# Altium PCB BARBAROV Power Distrubution Board PCB.PcbDoc
Units mm, origin at the board's own origin, x right, y up, seen from the top; angles counter-clockwise.
Board outline 135 x 80 mm, 2 copper layers (Top Layer, Bottom Layer); 26 components, 7 nets, 73 pads, 198 vias.
Unrouted connection lines stored in the file: 46.
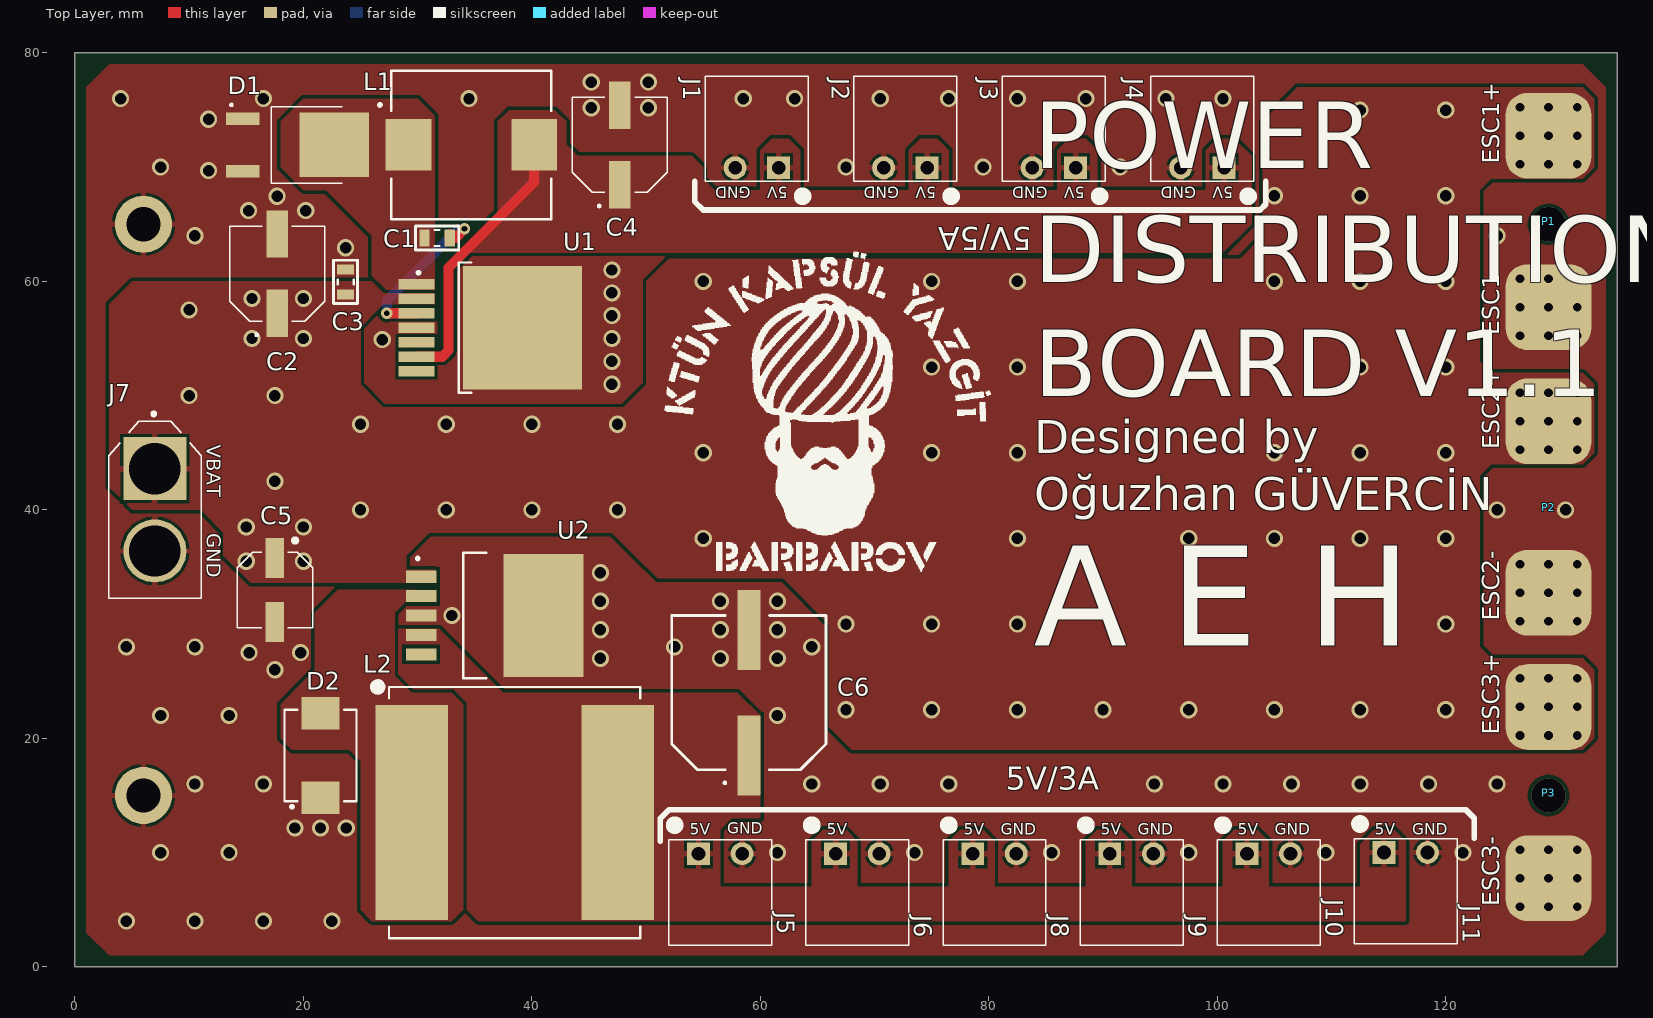
[diagram p0: Top Layer view]
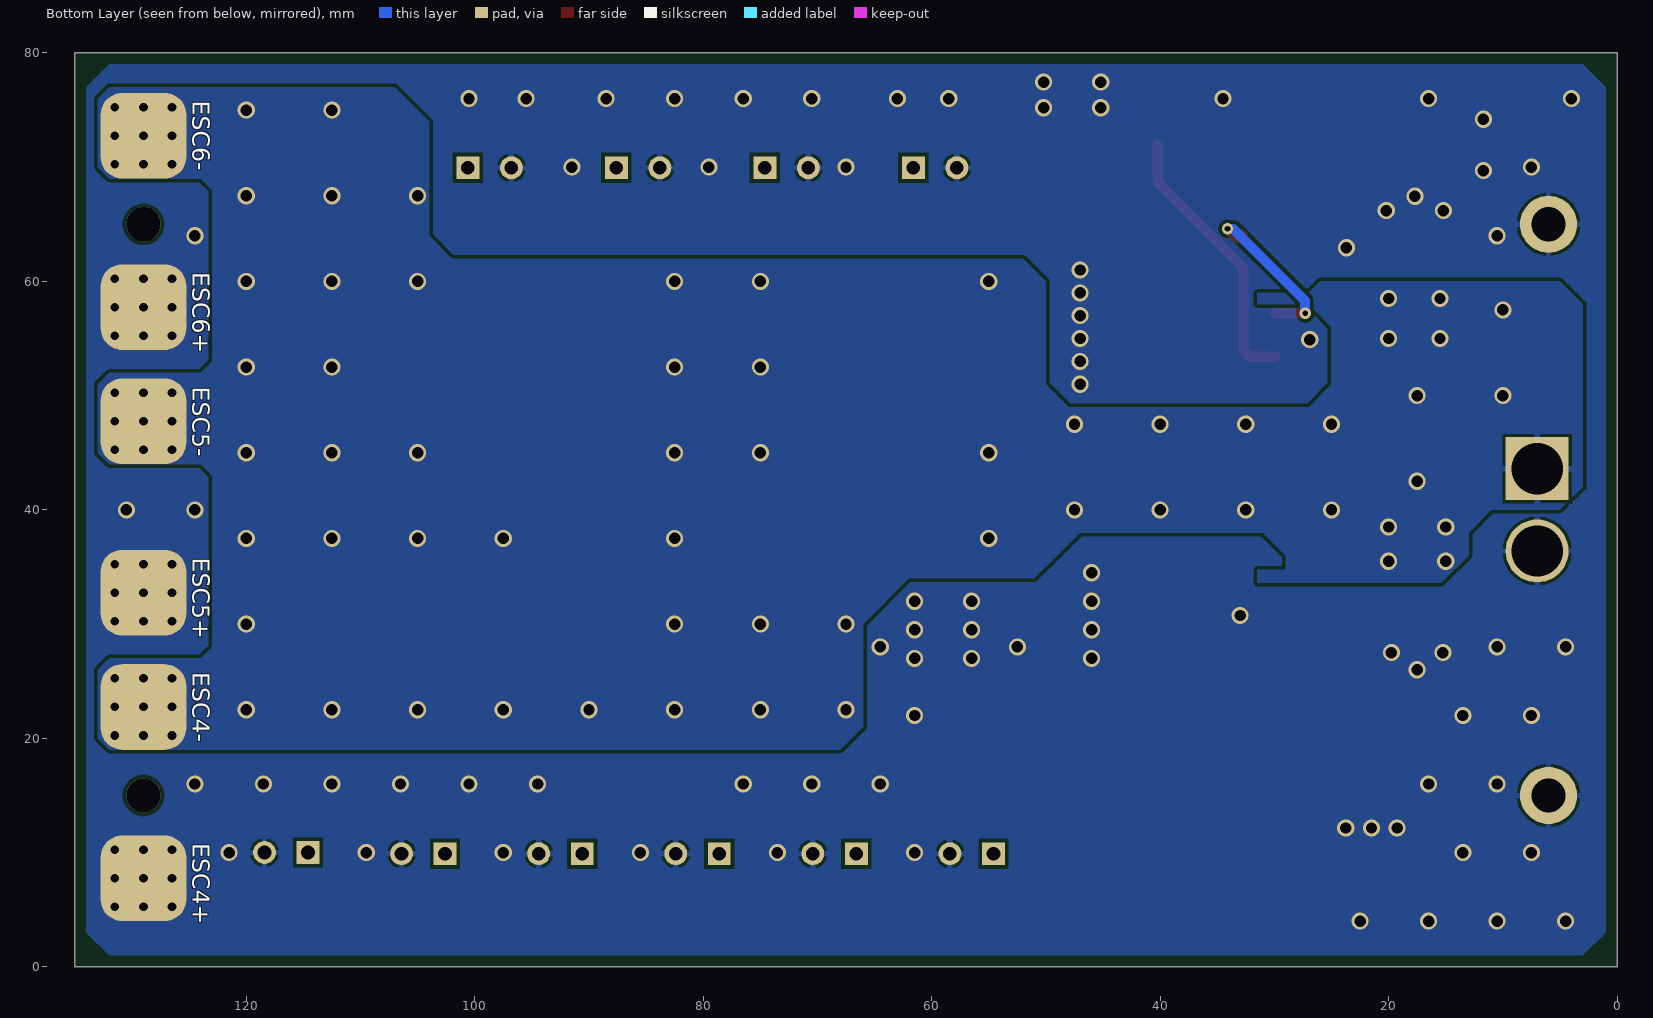
[diagram p1: Bottom Layer view, seen from below]
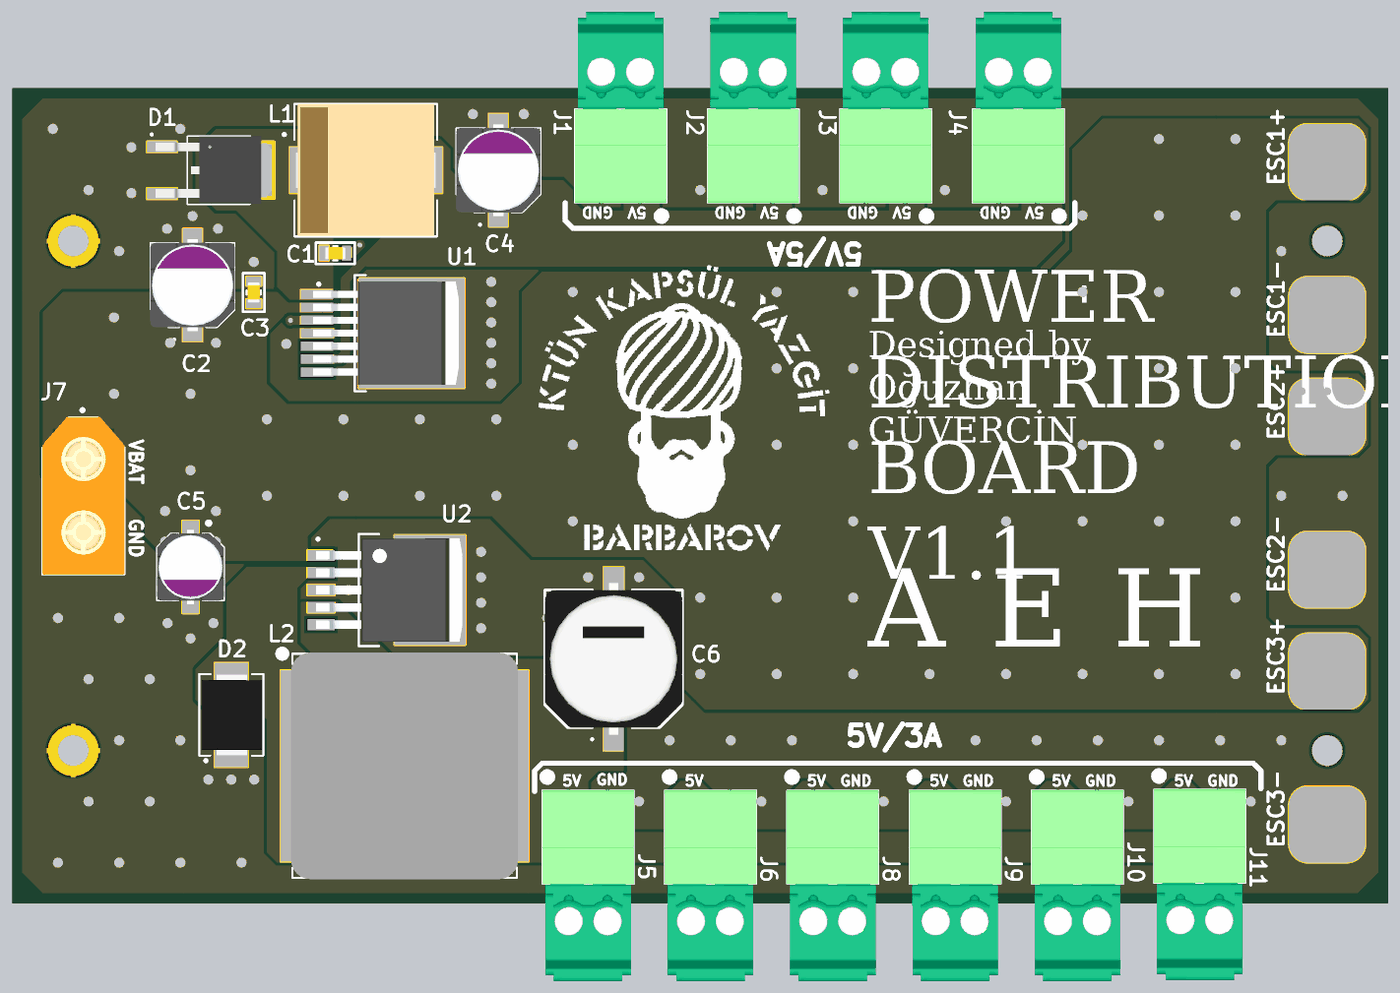
[diagram p2: 3D render of the assembled board from above, using the file's embedded part models]

## Layer stack, top to bottom
Top Solder: solder mask 0.0102, Solder Resist, Dk 3.5
Top Layer: signal copper 0.0356
Dielectric 1: dielectric 0.32, FR-4, Dk 4.8
Bottom Layer: signal copper 0.0356
Bottom Solder: solder mask 0.0102, Solder Resist, Dk 3.5

## Board outline
0,0 0,80 135,80 135,0

## Design rules (kind name [scope] priority, off if disabled: settings)
BoardOutlineClearance [All] p1: gap=0.2 ignorepadtopadclearanceinfootprint=FALSE except(0.4: Arc-SplitBarrior Arc-SplitContinuation Track-SplitBarrior Track-SplitContinuation SMDPad-SplitBarrior SMDPad-SplitContinuation THPad-SplitBarrior THPad-SplitContinuation Via-SplitBarrior Via-SplitContinuation Fill-SplitBarrior Fill-SplitContinuation Poly-SplitBarrior Poly-SplitContinuation Region-SplitBarrior Region-SplitContinuation Text-SplitBarrior Text-SplitContinuation)
Clearance Clearance_Poly [InPolygon] p1: gap=0.3 ignorepadtopadclearanceinfootprint=FALSE
Clearance "Clearance Bottom Layer" [OnLayer('Bottom Layer')] p2: gap=0.203 ignorepadtopadclearanceinfootprint=TRUE except(0.254: Arc-Text Track-Text SMDPad-Text THPad-Text Via-Text Fill-Text Poly-Text Region-Text Text-Text)
Clearance "Clearance Top Layer" [OnLayer('Top Layer')] p3: gap=0.203 ignorepadtopadclearanceinfootprint=TRUE except(0.254: Arc-Text Track-Text SMDPad-Text THPad-Text Via-Text Fill-Text Poly-Text Region-Text Text-Text)
Clearance [All] p4: gap=0.2 ignorepadtopadclearanceinfootprint=FALSE except(0.089: Arc-Arc Arc-Track Arc-SMDPad Track-Track Track-SMDPad SMDPad-SMDPad; 0.127: Arc-Via Track-Via SMDPad-Via THPad-Via Via-Via; 0.254: Arc-Text Track-Text SMDPad-Text THPad-Text Via-Text Fill-Text Poly-Text Region-Text Text-Text)
HoleSize [All] p1: absolutevalues=TRUE maxlimit=6.3 minlimit=0.2 maxpercent=80.000 minpercent=20.000
MinimumAnnularRing [All] p1: minimumring=0.076
MinimumSolderMaskSliver [All] p1: minsoldermaskwidth=0.1
PlaneConnect [All] p1: planeconnectstyle=Direct reliefexpansion=0.508 reliefentries=4 reliefconductorwidth=0.254 reliefairgap=0.254
PolygonConnect PolygonConnect_1 [All] p1: thpad.connectstyle=Relief thpad.reliefconductorwidth=0.508 thpad.reliefentries=4 thpad.polygonreliefangle="90 Angle" thpad.airgapwidth=0.254 smdpad.connectstyle=Direct smdpad.reliefconductorwidth=0.508 smdpad.reliefentries=4 smdpad.polygonreliefangle="90 Angle" smdpad.airgapwidth=0.254 via.connectstyle=Direct via.reliefconductorwidth=0.508 via.reliefentries=4 via.polygonreliefangle="90 Angle" via.airgapwidth=0.254
RoutingCorners [All] p1: cornerstyle=Round minsetback=2.54 maxsetback=2.54
RoutingVias [All] p1: holewidth=0.5 width=1 viastyle="Through Hole" minholewidth=0.2 minwidth=0.45 maxholewidth=1 maxwidth=2
SilkToSilkClearance [All] p1: silktosilkclearance=0.1
SilkToSolderMaskClearance [IsPad] p1: minsilkscreentomaskgap=0.1 clearancetoexposedcopper=TRUE
SolderMaskExpansion [All] p1: expansion=0.102 istentingtop=FALSE
Width [All] p1: maxlimit=20 minlimit=0.381 preferedwidth=1 minimp=50.000000 maximp=50.000000 favimp=50.000000
24 further rules are at their usual default settings.

## Components (designator, comment, footprint, x,y, rotation, side; value= is the part's Value field where it differs from the comment)
C1 "CAP_10nF_%10_50V_0805_X7R_CER" 0805_CAP 31.7,63.8 r180 top
C2 "CAP_180uF_20%_25V_SMD_ALUM POLY_8.30mmx8.30mm" RADIAL-2_8.30MMX8.30MM_PANASONIC 17.7,60.675 r90 top
C3 "CAP_100nF_50V_0805_C0G_CER" 0805_CAP 23.7,59.95 r90 top
C4 "CAP_330uF_20%_16V_SMD_ALUM POLY_8.30mm x 8.30mm" RADIAL-2_8.30MMX8.30MM_PANASONIC 47.7,71.95 r90 top
C5 "CAP_120uF_20%_20V_ALUM POLY_SMD" CAP_6SVPC330M 17.5,33 r270 top
C6 "CAP_470uF_20%_16V_SMD_ALUM" CAP_EEVTG1C471Q 59,24 r90 top
D1 "DIODE_SCHOTTKY_200V_10A_DPAK" 3PIN_DPAK_DIODE 19.2,71.95 r0 top
D2 "SL42-E3/57T" DIOM6959X25M 21.5,18.5 r90 top
J1 "CONN_TERM BLOCK_HDR_2POS_VERT_3.81MM" "CONN TERM BLOCK HDR 2POS 90DEG 3.81MM" 59.7,69.95 r180 top
J2 "CONN_TERM BLOCK_HDR_2POS_VERT_3.81MM" "CONN TERM BLOCK HDR 2POS 90DEG 3.81MM" 72.7,69.95 r180 top
J3 "CONN_TERM BLOCK_HDR_2POS_VERT_3.81MM" "CONN TERM BLOCK HDR 2POS 90DEG 3.81MM" 85.7,69.95 r180 top
J4 "CONN_TERM BLOCK_HDR_2POS_VERT_3.81MM" "CONN TERM BLOCK HDR 2POS 90DEG 3.81MM" 98.7,69.95 r180 top
J5 "CONN_TERM BLOCK_HDR_2POS_VERT_3.81MM" "CONN TERM BLOCK HDR 2POS 90DEG 3.81MM" 56.5,9.9 r0 top
J6 "CONN_TERM BLOCK_HDR_2POS_VERT_3.81MM" "CONN TERM BLOCK HDR 2POS 90DEG 3.81MM" 68.5,9.9 r0 top
J7 "CONN_XT60" XT60_CONN 7,40 r270 top
J8 "CONN_TERM BLOCK_HDR_2POS_VERT_3.81MM" "CONN TERM BLOCK HDR 2POS 90DEG 3.81MM" 80.5,9.9 r0 top
J9 "CONN_TERM BLOCK_HDR_2POS_VERT_3.81MM" "CONN TERM BLOCK HDR 2POS 90DEG 3.81MM" 92.5,9.9 r0 top
J10 "CONN_TERM BLOCK_HDR_2POS_VERT_3.81MM" "CONN TERM BLOCK HDR 2POS 90DEG 3.81MM" 104.5,9.9 r0 top
J11 "CONN_TERM BLOCK_HDR_2POS_VERT_3.81MM" "CONN TERM BLOCK HDR 2POS 90DEG 3.81MM" 116.5,10 r0 top
L1 "IND_10uH_10A_16.8MOHM_SMD" IND13.70MM13.70MMX7MM 34.7,71.95 r0 top
L2 "IND_100uH_9.1A_39.4MOHM_SM" SMD_IND_22.48MMX22.00MM 38.5,13.5 r0 top
P1 "ESC_PAD" ESC_SOLDER_PAD 129,65.25 r270 top
P2 "ESC_PAD" ESC_SOLDER_PAD 129,40.25 r270 top
P3 "ESC_PAD" ESC_SOLDER_PAD 129,15.25 r270 top
U1 "PMIC_LM2677" DPAK127P1435X464-8M 38.7,55.95 r0 top
U2 "PMIC_LM2576SX" TO-263-6/DDPAK 37,30.75 r0 top

## Footprints (in the part's own frame and the unit in brackets; to place one, negate y for a bottom-side part, rotate by r counter-clockwise, add the part's x,y. Pads: shape width x height; smd on the part's side, far side on the other; paste and mask are expansions set on the pad)
3PIN_DPAK_DIODE [mm]
  rect 2.94x1.1 smd: 1(-4.5,2.272) 3(-4.5,-2.3)
  rect 6.09x5.63 smd paste-4: 2(3.5,0)
  silkscreen extent -5.6,-3.35 4.19,3.6, body extent -5.14,-3.3 6.26,3.3, height 2.44
0805_CAP [mm] "Chip Resistor, 2-Leads, Body 2,00x1,25mm, IPC Medium Density"
  rect 0.9x1.5 smd: 1(-1.1,0) 2(1.1,0)
  silkscreen extent -1.9,-1.05 1.9,1.05, body extent -1,-0.6 1,0.6, height 1.21
CAP_6SVPC330M [mm]
  rect 3.5x1.6 smd: 1(-2.8,0) 2(2.8,0)
  silkscreen extent -4.55,-3.3 3.3,3.3, body extent -3.65,-3.3 3.65,3.3, height 5.9
CAP_EEVTG1C471Q [mm]
  rect 7x2 smd: 1(-5.5,0) 2(5.5,0)
  silkscreen extent -8,-6.75 6.75,6.75, body extent -7.45,-6.75 7.45,6.75, height 13.5
"CONN TERM BLOCK HDR 2POS 90DEG 3.81MM" [mm]
  rect 2x2 hole 1.2: 1(-1.905,0)
  round 2 hole 1.2: 2(1.905,0)
  silkscreen extent -4.5,-8 4.5,2.64, body extent -4.5,-17.55 4.5,1.3, height 7.6
DIOM6959X25M [mm] "Molded Diode, 2-Leads, Body 6,86x5,91mm, IPC Low Density"
  rect 2.85x3.3 smd: 1(-3.7,0) 2(3.7,0)
  silkscreen extent -4.62,-3.15 4,3.15, body extent -3.97,-3 3.97,2.91, height 2.25
DPAK127P1435X464-8M [mm] "D2-PAK, 8-Pads, Body 7,55x8,57mm (max), IPC Low Density"
  rect 3.16x0.91 smd: 1(-8.8,3.81) 2(-8.8,2.54) 3(-8.8,1.27) 4(-8.8,0) 5(-8.8,-1.27) 6(-8.8,-2.54) 7(-8.8,-3.81)
  rect 10.41x10.8 smd: 8(0.475,0)
  silkscreen extent -8.75,-5.7 -4,5.7, body extent -9.2,-5.08 5.1,5.08, height 4.72
ESC_SOLDER_PAD [mm]
  rrect50% 7.5x7.5 smd: 1(-7.5,0) 2(7.5,0)
  rrect50% 7.5x7.5 smd far side: 1(-7.5,0) 2(7.5,0)
IND13.70MM13.70MMX7MM [mm]
  rect 4x4.5 smd: 1(-5.5,0) 2(5.5,0)
  silkscreen extent -8.12,-6.5 7,6.5, body extent -6.85,-6.45 6.85,6.45, height 7.06
RADIAL-2_8.30MMX8.30MM_PANASONIC [mm]
  rect 4.15x1.9 smd: 1(-3.475,0) 2(3.475,0)
  silkscreen extent -5.45,-4.15 4.15,4.15, body extent -4.5,-4.15 4.5,4.15, height 11.91
SMD_IND_22.48MMX22.00MM [mm]
  rect 6.35x18.8 smd: 1(-9,0) 2(9,0)
  silkscreen extent -12.56,-11 11,11.56, body extent -11.13,-11.13 11.13,11.12, height 12.88
TO-263-6/DDPAK [mm]
  rect 2.66x1.07 smd mask+0.102: 1(-6.7,3.4) 2(-6.7,1.7) 3(-6.7,0) 4(-6.7,-1.7) 5(-6.7,-3.4)
  rect 7x10.8 smd mask+0.102: 6(4,0)
  silkscreen extent -7.12,-5.5 -1,5.5, body extent -7.18,-5.08 7.18,5.08, height 4.66
XT60_CONN [mm]
  rect 5.516x5.516 hole 4.5: 1(-3.6,0)
  round 5.516 hole 4.5: 2(3.6,0)
  silkscreen extent -8.55,-4.05 7.75,4.05, body extent -7.75,-4.05 7.75,4.05, height 15.88

## Part data
C1: "CAP CER 10000PF 50V X7R 0805", Capacitance=10nF, Case Code (Metric)=2012, Case Code (Imperial)=0805, Dielectric=X7R, Manufacturer=Samsung, Manufacturer Part Number=CL21B103KBANNNC, Max Operating Temperature=125°C, Min Operating Temperature=-55°C, Supplier Part Number 1=1276-1015-1-ND, Tolerance=10%, Voltage=50V, Case/Package=0805, Category="Ceramic Capacitors", ComponentLink1Description=https://datasheet.ciiva.com/25709/cl21b103kbannnc-25709781.pdf?src-supplier=Digi-Key, ComponentLink1URL=https://datasheet.ciiva.com/25709/cl21b103kbannnc-25709781.pdf?src-supplier=Digi-Key, ComponentLink2Description=https://datasheet.ciiva.com/29199/455082-da-01-en-vs-kondensator-0805-29199459.pdf?src-supplier=Conrad, ComponentLink2URL=https://datasheet.ciiva.com/29199/455082-da-01-en-vs-kondensator-0805-29199459.pdf?src-supplier=Conrad, Construction=Flat, Contact Plating=Tin, Depth=1.25mm, Height=0.65mm, Lead Free="Lead Free", Length=2mm, Material=Ceramic, Mount="Surface Mount", Packaging="Tape and Reel", Pricing 1="1=0,10000, 10=0,04600, 50=0,02500, 100=0,02050, 500=0,01464, 1000=0,01150 (USD)", Radiation Hardening=No, RoHS=Yes, RoHS Compliant=Yes, Series=CL, Stock 1=1431273, Supplier 1=Digi-Key, Thickness=0.03inch, Voltage Rating=50V, Voltage Rating (DC)=50V, Width=0.049inch
C2: "Cap Aluminum Polymer 180uF 25V 20% Cylindrical 16m Ohm 1470mA 2000 hr 125°C Emboss T/R", Capacitance=180uF, Manufacturer=Panasonic, Manufacturer Part Number=25SVT180M, Supplier Part Number 1=10-25SVT180MCT-ND, Category="Polymer Capacitors", Pricing 1="1=3,01000, 10=2,43800, 50=2,12720, 100=1,86140 (USD)", RoHS=Yes, Stock 1=129, Supplier 1=Digi-Key
C3: "Cap Ceramic 0.1uF 50V X7R 20% SMD 0805 125C Paper T/R", Capacitance=100nF, Case/Package=0805, Dielectric=X7R, Dielectric Material=Ceramic, Manufacturer=KEMET, Manufacturer Part Number=C0805C104M5RACTU, Max Operating Temperature=125°C, Min Operating Temperature=-55°C, Supplier Part Number 1=399-C0805C104M5RAC7800CT-ND, Tolerance=20%, Voltage Rating (DC)=50V, Category="Ceramic Capacitors", ComponentLink1Description=http://uk.rs-online.com/webdocs/13da/0900766b813daa06.pdf?src-supplier=RSComponents, ComponentLink1URL=http://uk.rs-online.com/webdocs/13da/0900766b813daa06.pdf?src-supplier=RSComponents, ComponentLink2Description=http://uk.rs-online.com/webdocs/1515/0900766b81515223.pdf?src-supplier=RSComponents, ComponentLink2URL=http://uk.rs-online.com/webdocs/1515/0900766b81515223.pdf?src-supplier=RSComponents, ComponentLink3Description=http://www.farnell.com/datasheets/2739857.pdf?src-supplier=Farnell, ComponentLink3URL=http://www.farnell.com/datasheets/2739857.pdf?src-supplier=Farnell, ComponentLink4Description=http://components.arrow.com/part/dataview/0323_00324812?src-supplier=Arrow+Europe, ComponentLink4URL=http://components.arrow.com/part/dataview/0323_00324812?src-supplier=Arrow+Europe, ComponentLink5Description=http://uk.rs-online.com/webdocs/1528/0900766b81528e2f.pdf?src-supplier=RSComponents, ComponentLink5URL=http://uk.rs-online.com/webdocs/1528/0900766b81528e2f.pdf?src-supplier=RSComponents, ComponentLink6Description=http://www.farnell.com/datasheets/2739857.pdf?src-supplier=Newark, ComponentLink6URL=http://www.farnell.com/datasheets/2739857.pdf?src-supplier=Newark, ComponentLink7Description=https://api.kemet.com/component-edge/download/datasheet/C0805C104M5RACTU.pdf?src-supplier=Digi-Key, ComponentLink7URL=https://api.kemet.com/component-edge/download/datasheet/C0805C104M5RACTU.pdf?src-supplier=Digi-Key, ComponentLink8Description=http://www.farnell.com/datasheets/2739857.pdf?src-supplier=Element14, ComponentLink8URL=http://www.farnell.com/datasheets/2739857.pdf?src-supplier=Element14, ComponentLink9Description=http://www.alliedelec.com/m/d/9bfe7773041ffe9d406e68bc7b377fdd.pdf?src-supplier=Allied+Electronics, ComponentLink9URL=http://www.alliedelec.com/m/d/9bfe7773041ffe9d406e68bc7b377fdd.pdf?src-supplier=Allied+Electronics, ComponentLink10Description=http://www.mouser.com/ds/2/212/KEM_C1002_X7R_SMD-1102033.pdf?src-supplier=Mouser, ComponentLink10URL=http://www.mouser.com/ds/2/212/KEM_C1002_X7R_SMD-1102033.pdf?src-supplier=Mouser, ComponentLink11Description=http://capacitoredge.kemet.com/capedge2/DataSheet?pn=C0805C104M5RACTU&src-supplier=Avnet+Europe, ComponentLink11URL=http://capacitoredge.kemet.com/capedge2/DataSheet?pn=C0805C104M5RACTU&src-supplier=Avnet+Europe, Depth=1.25mm, Height=0.9mm, Length=2mm, Mount="Surface Mount", Packaging="Tape and Reel", Pricing 1="1=0,10000, 10=0,06400, 50=0,03500, 100=0,02860, 500=0,02040, 1000=0,01603 (USD)", Radiation Hardening=No, RoHS=Yes, Stock 1=4863, Supplier 1=Digi-Key
C4: "Cap Alum Poly 330UF 20% 16V SMD", Capacitance=330uF, Case/Package=Radial, ESR (Equivalent Series Resistance)=10mR, Manufacturer="Wurth Electronics", Manufacturer Part Number=875075355004, Max Operating Temperature=105°C, Min Operating Temperature=-55°C, Package Quantity=400, Ripple Current=4.7A, Supplier Part Number 1=732-6491-1-ND, Tolerance=20%, Voltage Rating=16V, Category="Polymer Capacitors", ComponentLink1Description=http://www.farnell.com/datasheets/1880458.pdf?src-supplier=Farnell, ComponentLink1URL=http://www.farnell.com/datasheets/1880458.pdf?src-supplier=Farnell, ComponentLink2Description=http://katalog.we-online.de/pbs/datasheet/875075355004.pdf?src-supplier=Digi-Key, ComponentLink2URL=http://katalog.we-online.de/pbs/datasheet/875075355004.pdf?src-supplier=Digi-Key, ComponentLink3Description=http://www.farnell.com/datasheets/1880458.pdf?src-supplier=Element14, ComponentLink3URL=http://www.farnell.com/datasheets/1880458.pdf?src-supplier=Element14, Height - Seated (Max)=0.461inch, Life (Hours)=2000Hour, Mount="Surface Mount", Packaging="Tape and Reel", Polarity=Polar, Pricing 1="1=1,18000, 50=1,00600, 100=0,87700 (USD)", REACH SVHC=Unknown, RoHS=Yes, RoHS Compliant=Yes, Stock 1=2224, Supplier 1=Digi-Key, Voltage Rating (DC)=16V
C5: "Cap Aluminum Polymer 120uF 20VDC 20%( 6.3 X 5.9mm) SMD 0.025 Ohm 3200mA 5000h 105C T/R", Capacitance=120uF, Case/Package=Radial, ESR (Equivalent Series Resistance)=25mR, Leakage Current=480uA, Manufacturer=Panasonic, Manufacturer Part Number=20SVPF120M, Max Operating Temperature=105°C, Min Operating Temperature=-55°C, Package Quantity=1000, Ripple Current=3.2A, Supplier Part Number 1=P16498CT-ND, Tolerance=20%, Voltage=20V, Category="Aluminum Electrolytic Capacitors", ComponentLink1Description=https://datasheet.ciiva.com/24432/svpf-series-datasheet-24432811.pdf?src-supplier=Onlinecomponents.com, ComponentLink1URL=https://datasheet.ciiva.com/24432/svpf-series-datasheet-24432811.pdf?src-supplier=Onlinecomponents.com, ComponentLink2Description=https://datasheet.ciiva.com/25746/1734360-25746680.pdf?src-supplier=Farnell, ComponentLink2URL=https://datasheet.ciiva.com/25746/1734360-25746680.pdf?src-supplier=Farnell, ComponentLink3Description=https://datasheet.ciiva.com/22746/1734360-22746206.pdf?src-supplier=Element14, ComponentLink3URL=https://datasheet.ciiva.com/22746/1734360-22746206.pdf?src-supplier=Element14, ComponentLink4Description=https://datasheet.ciiva.com/46650/70324301-46650876.pdf?src-supplier=Allied+Electronics, ComponentLink4URL=https://datasheet.ciiva.com/46650/70324301-46650876.pdf?src-supplier=Allied+Electronics, Diameter=6.3mm, Dissipation Factor=12%, Height=5.9mm, Height - Seated (Max)=0.236inch, Lead Free="Lead Free", Length=5.9mm, Life (Hours)=5000Hour, Material=Polymer, Mount="Surface Mount", Number of Pins=6, Packaging="Tape and Reel", Polarity=Polar, Pricing 1="1=1,41000, 10=1,11000, 50=0,96240, 100=0,83280, 500=0,62922 (USD)", Radiation Hardening=No, REACH SVHC="No SVHC", Ripple Current (AC)=3.2A, RoHS=Yes, RoHS Compliant=Yes, Stock 1=5, Supplier 1=Digi-Key, Termination=SMD/SMT, Voltage Rating=20V, Voltage Rating (DC)=20V
C6: "贴片铝电解电容 470uF ±20% 16V 0.12Ω 2000hrs@125°C AEC_D12.5x13.5mm_SM", Capacitance=470uF, Case/Package=Radial, ESR (Equivalent Series Resistance)=120mR, Manufacturer=Panasonic, Manufacturer Part Number=EEV-TG1C471Q, Max Operating Temperature=125°C, Min Operating Temperature=-40°C, Package Quantity=200, Ripple Current=800mA, Supplier Part Number 1=PCE3629CT-ND, Tolerance=20%, Voltage Rating=16V, Category="Aluminum Electrolytic Capacitors", ComponentLink1Description=https://datasheet.ciiva.com/8081/aba0000ce101-8081367.pdf?src-supplier=Element14, ComponentLink1URL=https://datasheet.ciiva.com/8081/aba0000ce101-8081367.pdf?src-supplier=Element14, ComponentLink2Description=https://datasheet.ciiva.com/43470/1678958-43470874.pdf?src-supplier=Farnell, ComponentLink2URL=https://datasheet.ciiva.com/43470/1678958-43470874.pdf?src-supplier=Farnell, ComponentLink3Description=https://datasheet.ciiva.com/46379/1678958-46379244.pdf?src-supplier=Element14, ComponentLink3URL=https://datasheet.ciiva.com/46379/1678958-46379244.pdf?src-supplier=Element14, ComponentLink4Description=https://datasheet.ciiva.com/31417/1678958-31417838.pdf?src-supplier=Farnell, ComponentLink4URL=https://datasheet.ciiva.com/31417/1678958-31417838.pdf?src-supplier=Farnell, ComponentLink5Description=https://datasheet.ciiva.com/46372/1678958-46372616.pdf?src-supplier=Element14, ComponentLink5URL=https://datasheet.ciiva.com/46372/1678958-46372616.pdf?src-supplier=Element14, ComponentLink6Description=https://datasheet.ciiva.com/24025/aba0000ce101-30808-24025129.pdf?src-supplier=Mouser, ComponentLink6URL=https://datasheet.ciiva.com/24025/aba0000ce101-30808-24025129.pdf?src-supplier=Mouser, ComponentLink7Description=https://datasheet.ciiva.com/14598/70068299-14598696.pdf?src-supplier=Allied+Electronics, ComponentLink7URL=https://datasheet.ciiva.com/14598/70068299-14598696.pdf?src-supplier=Allied+Electronics, ComponentLink8Description=https://datasheet.ciiva.com/11679/aba0000ce101-11679349.pdf?src-supplier=Avnet, ComponentLink8URL=https://datasheet.ciiva.com/11679/aba0000ce101-11679349.pdf?src-supplier=Avnet, ComponentLink9Description=https://datasheet.ciiva.com/30085/aba0000ce101-30085800.pdf?src-supplier=Onlinecomponents.com, ComponentLink9URL=https://datasheet.ciiva.com/30085/aba0000ce101-30085800.pdf?src-supplier=Onlinecomponents.com, Construction=Cylindrical, Diameter=12.5mm, Dissipation Factor=0.23%, Height=13.5mm, Height - Seated (Max)=0.531inch, Lead Free="Lead Free", Length=13.5mm, Life (Hours)=2000Hour, Mount="Surface Mount,PCB", Packaging="Tape and Reel", Polarity=Polar, Pricing 1="1=1,92000, 10=1,51400, 50=1,31240, 100=1,13570 (USD)", Radiation Hardening=No, REACH SVHC="No SVHC", Ripple Current (AC)=800mA, RoHS=Yes, RoHS Compliant=Yes, Series=TG, Stock 1=6175, Supplier 1=Digi-Key, Termination=SMD/SMT, Voltage Rating (DC)=16V, Width=900um
D1: "Diode Schottky 200V 10A Dpak", Manufacturer="Sangdest Microelectronics", Manufacturer Part Number=SBRD10200, Supplier Part Number 1=1655-SBRD10200CT-ND, Category=Uncategorized, Pricing 1="1=0,59000, 10=0,50300, 100=0,37580, 500=0,29524, 1000=0,22814 (USD)", RoHS=No, Stock 1=138862, Supplier 1=Digi-Key
D2: library part "DIODE SCHOTTKY 20V 4A DO214AB", "SL42 Series 20 V 2 A Surface Mount Schottky Barrier Rectifier - DO-214AB (SMC)", Average Rectified Current=4A, Case/Package=SMC, Forward Voltage=470mV, Manufacturer="Vishay Semiconductors", Max Forward Surge Current (Ifsm)=150A, Max Operating Temperature=125°C, Max Repetitive Reverse Voltage (Vrrm)=20V, Max Reverse Current=500uA, Min Operating Temperature=-55°C, Package Quantity=1, Supplier Part Number 1=SL42-E3/57TGICT-ND, Category="Rectifier Diodes", ComponentLink1Description=https://datasheet.ciiva.com/4714/88742-103296-4714672.pdf?src-supplier=Mouser, ComponentLink1URL=https://datasheet.ciiva.com/4714/88742-103296-4714672.pdf?src-supplier=Mouser, ComponentLink2Description=https://datasheet.ciiva.com/16355/sl42-16355184.pdf?src-supplier=Future+Electronics, ComponentLink2URL=https://datasheet.ciiva.com/16355/sl42-16355184.pdf?src-supplier=Future+Electronics, ComponentLink3Description=https://datasheet.ciiva.com/23793/1691224-23793280.pdf?src-supplier=Newark, ComponentLink3URL=https://datasheet.ciiva.com/23793/1691224-23793280.pdf?src-supplier=Newark, ComponentLink4Description=https://datasheet.ciiva.com/4246/sl42-4246044.pdf?src-supplier=Arrow+Electronics, ComponentLink4URL=https://datasheet.ciiva.com/4246/sl42-4246044.pdf?src-supplier=Arrow+Electronics, Current Rating=4A, Element Configuration=Single, Forward Current=4A, Lead Free="Lead Free", Manufacturer Part Number=SL42-E3/57T, Max Reverse Leakage Current=500uA, Max Reverse Voltage (DC)=20V, Max Surge Current=150A, Mount="Surface Mount", Number of Pins=2, Output Current=4A, Packaging="Tape and Reel", Peak Non-Repetitive Surge Current=150A, Polarity=Standard, Pricing 1="1=0,97000, 10=0,87000, 100=0,67830 (USD)", Radiation Hardening=No, REACH SVHC=Unknown, RoHS=Yes, RoHS Compliant=Yes, Series=-, Stock 1=210, Supplier 1=Digi-Key, Voltage Rating (DC)=20V
J1 J2 J3 J4 J5 J6 J8 J9 J10 J11: "2 Position Terminal Block Header, Male Pins, Shrouded (4 Side) 0.150\" (3.81mm) 90°, Right Angle - Through Hole", Color=Green, Current=8A, Flammability Rating="UL94 V-0", Manufacturer="Phoenix Contact", Manufacturer Part Number=1803277, Package Quantity=50, Supplier Part Number 1=277-1206-ND, Voltage=300V, Voltage Rating=160V, Voltage Rating (DC)=640mV, Approvals=UL,CSA, Category="Terminal Blocks", ComponentLink1Description=https://datasheet.ciiva.com/16096/1803277-16096845.pdf?src-supplier=Onlinecomponents.com, ComponentLink1URL=https://datasheet.ciiva.com/16096/1803277-16096845.pdf?src-supplier=Onlinecomponents.com, ComponentLink2Description=https://datasheet.ciiva.com/26840/getdatasheetpartid-233794-26840495.pdf?src-supplier=Verical, ComponentLink2URL=https://datasheet.ciiva.com/26840/getdatasheetpartid-233794-26840495.pdf?src-supplier=Verical, ComponentLink3Description=https://datasheet.ciiva.com/11746/0900766b80029ea6-11746612.pdf?src-supplier=RSComponents, ComponentLink3URL=https://datasheet.ciiva.com/11746/0900766b80029ea6-11746612.pdf?src-supplier=RSComponents, ComponentLink4Description=https://datasheet.ciiva.com/795/1803277-795413.pdf?src-supplier=Digi-Key, ComponentLink4URL=https://datasheet.ciiva.com/795/1803277-795413.pdf?src-supplier=Digi-Key, ComponentLink5Description=https://datasheet.ciiva.com/23596/1581611-23596276.pdf?src-supplier=Newark, ComponentLink5URL=https://datasheet.ciiva.com/23596/1581611-23596276.pdf?src-supplier=Newark, ComponentLink6Description=https://datasheet.ciiva.com/29212/740533-da-01-de-leiterplattenstecker-mc-1-5-2-g-3-81-29212066.pdf?src-supplier=Conrad, ComponentLink6URL=https://datasheet.ciiva.com/29212/740533-da-01-de-leiterplattenstecker-mc-1-5-2-g-3-81-29212066.pdf?src-supplier=Conrad, Connector Type="Plug,PCB,Terminal Block", Contact Gender=Male, Contact Material=Tin, Contact Plating=Tin, Current Rating=8A, Depth=9.2mm, Gender=Male, Height=9.2mm, Housing Color=Green, Housing Material=Polybutylene, Lead Free="Lead Free", Length=9.01mm, Max Current Rating=8A, Mount="Through Hole", Number of Contacts=2, Number of Levels=1, Number of Poles=2, Number of Positions=2, Number of Positions Per Level=2, Number of Rows=1, Orientation="Right Angle", Packaging=Bulk, Pitch=3.81mm, Pricing 1="1=0,91000, 10=0,87400, 50=0,83600, 100=0,81320, 250=0,76000, 500=0,69920, 1000=0,64600, 2500=0,61560, 5000=0,58520 (USD)", REACH SVHC=Unknown, RoHS=Yes, RoHS Compliant=Yes, Series=MC, Stock 1=18415, Supplier 1=Digi-Key, Termination=Solder, Voltage Rating (AC)=160V, Weight=4oz, Width=10.65mm
J7: "XT60 Connectors Male/female Pair", Manufacturer=SparkFun, Manufacturer Part Number=PRT-10474, Supplier Part Number 1=1568-1816-ND, ComponentLink1Description=https://cdn.sparkfun.com/datasheets/Prototyping/xt60.pdf?src-supplier=Digi-Key, ComponentLink1URL=https://cdn.sparkfun.com/datasheets/Prototyping/xt60.pdf?src-supplier=Digi-Key, Pricing 1="1=1,50000 (USD)", RoHS=No, Stock 1=2196, Supplier 1=Digi-Key
L1: "Inductor Power Shielded Wirewound 10uH 20% 100KHz Iron 10A 0.0168Ohm DCR T/R", Case/Package=Nonstandard, Current=15A, Current Rating=10A, DC Resistance (DCR)=16.8mR, Manufacturer=Bourns, Manufacturer Part Number=SRP1270-100M, Max Operating Temperature=125°C, Min Operating Temperature=-55°C, Package Quantity=400, Resistor Type=Wirewound, Saturation Current=16A, Self Resonant Frequency=10MHz, Supplier Part Number 1=SRP1270-100MCT-ND, Test Frequency=100kHz, Tolerance=20%, Inductance=10uH, Category="Fixed Inductors", ComponentLink1Description=https://datasheet.ciiva.com/22704/1834359-22704150.pdf?src-supplier=Element14, ComponentLink1URL=https://datasheet.ciiva.com/22704/1834359-22704150.pdf?src-supplier=Element14, ComponentLink2Description=https://datasheet.ciiva.com/11802/0900766b80f2b679-11802877.pdf?src-supplier=RSComponents, ComponentLink2URL=https://datasheet.ciiva.com/11802/0900766b80f2b679-11802877.pdf?src-supplier=RSComponents, ComponentLink3Description=https://datasheet.ciiva.com/3082/srp1270-3082275.pdf?src-supplier=Avnet, ComponentLink3URL=https://datasheet.ciiva.com/3082/srp1270-3082275.pdf?src-supplier=Avnet, ComponentLink4Description=https://datasheet.ciiva.com/6698/srp1270-6698645.pdf?src-supplier=Digi-Key, ComponentLink4URL=https://datasheet.ciiva.com/6698/srp1270-6698645.pdf?src-supplier=Digi-Key, ComponentLink5Description=https://datasheet.ciiva.com/6698/srp1270-6698646.pdf?src-supplier=Digi-Key, ComponentLink5URL=https://datasheet.ciiva.com/6698/srp1270-6698646.pdf?src-supplier=Digi-Key, ComponentLink6Description=https://datasheet.ciiva.com/15160/getdatasheetpartid-137626-15160492.pdf?src-supplier=Verical, ComponentLink6URL=https://datasheet.ciiva.com/15160/getdatasheetpartid-137626-15160492.pdf?src-supplier=Verical, ComponentLink7Description=https://datasheet.ciiva.com/17286/srp1270-17286206.pdf?src-supplier=Avnet+Europe, ComponentLink7URL=https://datasheet.ciiva.com/17286/srp1270-17286206.pdf?src-supplier=Avnet+Europe, Core Material=Ferrite, DC Current=10A, Depth=13.7mm, Height=7mm, Height - Seated (Max)=0.276inch, Length=13.7mm, Max DC Current=10A, Military Standard=Not, Mount="Surface Mount", Packaging="Tape and Reel", Pricing 1="1=1,83000, 10=1,69100, 25=1,54960, 50=1,32420, 100=1,18340 (USD)", Radiation Hardening=No, REACH SVHC="No SVHC", RMS Current (Irms)=10A, RoHS=Yes, RoHS Compliant=Yes, Series=SRP1270, Shielding=Shielded, Stock 1=10712, Supplier 1=Digi-Key, Termination=SMD/SMT, Width=0.539inch, Inductance Tolerance=20%
L2: "Inductor Power Shielded Wirewound 100uH 20% 100KHz Powdered Iron 9.1A 0.0394Ohm DCR 8787 T/R", Case/Package=8787, DC Resistance (DCR)=39.4mR, Manufacturer="Vishay Dale", Manufacturer Part Number=IHLP8787MZER101M51, Max DC Current=9.1A, Max Operating Temperature=155°C, Min Operating Temperature=-55°C, Package Quantity=100, Supplier Part Number 1=541-IHLP8787MZER101M51CT-ND, Tolerance=20%, Inductance=100uH, Category=Inductors, ComponentLink1Description=http://www.mouser.com/ds/2/427/ihlp8787mz51-537150.pdf?src-supplier=Mouser, ComponentLink1URL=http://www.mouser.com/ds/2/427/ihlp8787mz51-537150.pdf?src-supplier=Mouser, Height=13mm, Length=22mm, Packaging="Tape and Reel", Pricing 1="1=10,02000, 10=8,91000, 25=8,24160, 50=7,12800 (USD)", RoHS=Yes, RoHS Compliant=Yes, Shielding=Shielded, Stock 1=27, Supplier 1=Digi-Key, Termination=SMD/SMT, Width=22.48mm
U1: "SIMPLE SWITCHE High Efficiency 5A Step-Down Voltage egulator with Sync 7-DDPAK/TO-263 -40 to 125", Case/Package=TO-263, Manufacturer="TI National Semiconductor", Manufacturer Part Number=LM2677SX-5.0/NOPB, Max Operating Temperature=125°C, Max Output Current=5A, Max Input Voltage=40V, Min Operating Temperature=-40°C, Min Output Voltage=5V, Min Input Voltage=8V, Package Quantity=500, Quiescent Current=4.2mA, Supplier Part Number 1=296-48568-1-ND, Switching Frequency=260kHz, Category="Voltage Regulators - Switching", ComponentLink1Description=https://datasheet.ciiva.com/15112/getdatasheetpartid-55533-15112619.pdf?src-supplier=Verical, ComponentLink1URL=https://datasheet.ciiva.com/15112/getdatasheetpartid-55533-15112619.pdf?src-supplier=Verical, ComponentLink2Description=https://datasheet.ciiva.com/26100/lm2677-26100074.pdf?src-supplier=Avnet+Europe, ComponentLink2URL=https://datasheet.ciiva.com/26100/lm2677-26100074.pdf?src-supplier=Avnet+Europe, ComponentLink3Description=https://datasheet.ciiva.com/14304/lm2677-14304284.pdf?src-supplier=Avnet, ComponentLink3URL=https://datasheet.ciiva.com/14304/lm2677-14304284.pdf?src-supplier=Avnet, Contact Plating=Tin,Matte, Efficiency=84%, Lead Free="Contains Lead", Mount="Surface Mount", Number of Outputs=1, Operating Supply Voltage=40V, Output Configuration=Positive, Output Current=5A, Output Type=Fixed, Output Voltage=5V, Packaging="Tape and Reel", Pricing 1="1=6,95000, 10=6,24400, 25=5,90280, 100=5,11580, 250=4,85348 (USD)", Radiation Hardening=No, RoHS=Yes, RoHS Compliant=Yes, Stock 1=763, Supplier 1=Digi-Key, Synchronous Rectifier=No
U2: "IC REG BUCK 5V 3A TO263-5", Case/Package=TO-263-6, Manufacturer="TI National Semiconductor", Manufacturer Part Number=LM2576SX-5.0/NOPB, Max Operating Temperature=125°C, Max Output Current=3A, Max Input Voltage=40V, Min Operating Temperature=-40°C, Min Input Voltage=4V, Nominal Output Voltage=5V, Package Quantity=500, Quiescent Current=5mA, Supplier Part Number 1=LM2576SX-5.0/NOPBCT-ND, Switching Frequency=52kHz, Category="Voltage Regulators - Switching", ComponentLink1Description=https://datasheet.ciiva.com/41457/001013741-da-01-en-ic-reg-bu-lm2576sx-5-0-nopb-to-263-5-tid-41457614.pdf?src-supplier=Conrad, ComponentLink1URL=https://datasheet.ciiva.com/41457/001013741-da-01-en-ic-reg-bu-lm2576sx-5-0-nopb-to-263-5-tid-41457614.pdf?src-supplier=Conrad, Contact Plating=Tin, Efficiency=77%, Lead Free="Contains Lead", Mount="Surface Mount", Number of Outputs=1, Number of Pins=5, Operating Supply Voltage=40V, Output Current=3A, Output Type=Fixed, Output Voltage=5V, Packaging="Tape and Reel", Pricing 1="1=4,06000, 10=3,64300, 25=3,44400, 100=2,98470, 250=2,83168 (USD)", Radiation Hardening=No, REACH SVHC="No SVHC", RoHS=Yes, RoHS Compliant=Yes, Series="SIMPLE SWITCHER®", Stock 1=2560, Supplier 1=Digi-Key, Synchronous Rectifier=No

## Free pads (board coordinates)
  round 5 hole 3: 1(6,65) 2(6,15)
  round 3 hole 3: 3(129,65) 4(129,15)

## Via types
v1: diameter 1.5, hole 1, Top Layer to Bottom Layer, tented both sides, 142 vias
v2: diameter 1, hole 0.75, Top Layer to Bottom Layer, 54 vias
v3: diameter 1, hole 0.5, Top Layer to Bottom Layer, tented both sides, 2 vias

## Nets (pads, with @x,y where several pads share a name; then routed paths per layer and width w, separated by ;. In a path a pad name is that pad's centre, name@x,y a point inside that pad or via, vN(x,y) a via of type N, cw(c..) or ccw(c..) an arc to the next point about the centre after c; other vN are vias at no path point)
5V/3A: C6.1 J5.1 J6.1 J8.1 J9.1 J10.1 J11.1 L2.2 U2.4
5V/5A: C4.1 J1.1 J2.1 J3.1 J4.1 L1.2 U1.6 | length 24.1
  Top Layer w0.9: U1.6 32.16,53.41 32.7,53.95 32.7,61.2 40.2,68.7 L1.2
CB: C1.1 U1.3 | length 14.6
  Top Layer w0.9: v3(27.3,57.2) 27.315,57.215 29.895,57.215 U1.3 ; C1.1 C1.1@32.8,64.1 ; 33.308,63.792 34.1,64.584 v3(34.1,64.6)
  Bottom Layer w0.9: v3(27.3,57.2) 27.319,57.219 27.319,58.319 33.581,64.581 34.081,64.581 v3(34.1,64.6)
GND: C2.2 C3.2 C4.2 C5.2 C6.2 D1.1 D1.3 D2.1 J1.2 J2.2 J3.2 J4.2 J5.2 J6.2 J7.2 J8.2 J9.2 J10.2 J11.2 P1.2 P2.2 P3.2 pad.1 pad.2 U1.4 U1.8 U2.3 U2.6
  other v1: 4.5,4 10.5,4 16.5,4 22.5,4 7.5,10 13.5,10 61.5,10 73.5,10 85.5,10 97.5,10 109.5,10 121.5,10 19.25,12.15 21.5,12.15 23.75,12.15 10.5,16 16.5,16 64.5,16 70.5,16 76.5,16 94.5,16 100.5,16 106.5,16 112.5,16 118.5,16 124.5,16 7.5,22 13.5,22 61.5,22 17.5,26 46,27 56.5,27 61.5,27 15.25,27.5 19.75,27.5 4.5,28 10.5,28 52.5,28 64.5,28 46,29.5 56.5,29.5 61.5,29.5 33,30.75 46,32 56.5,32 61.5,32 46,34.5 124.5,40 130.5,40 47,51 47,53 26.9,54.9 47,55 47,57 47,59 47,61 23.7,62.95 10.5,64 124.5,64 15.2,66.2 20.2,66.2 17.7,67.45 11.7,69.7 7.5,70 67.5,70 79.5,70 91.5,70 11.7,74.2 45.2,75.2 50.2,75.2 4,76 16.5,76 34.5,76 58.5,76 63,76 70.5,76 76.5,76 82.5,76 88.5,76 95.5,76 100.5,76 45.2,77.45 50.2,77.45
  other v2: 126.5,5.25 129,5.25 131.5,5.25 126.5,7.75 129,7.75 131.5,7.75 126.5,10.25 129,10.25 131.5,10.25 126.5,30.25 129,30.25 131.5,30.25 126.5,32.75 129,32.75 131.5,32.75 126.5,35.25 129,35.25 131.5,35.25 126.5,55.25 129,55.25 131.5,55.25 126.5,57.75 129,57.75 131.5,57.75 126.5,60.25 129,60.25 131.5,60.25
L_OUT_3A: D2.2 L2.1 U2.2
L_OUT_5A: C1.2 D1.2 L1.1 U1.1
VBAT: C2.1 C3.1 C5.1 J7.1 P1.1 P2.1 P3.1 U1.2 U2.1
  other v1: 67.5,22.5 75,22.5 82.5,22.5 90,22.5 97.5,22.5 105,22.5 112.5,22.5 120,22.5 67.5,30 75,30 82.5,30 120,30 15,35.5 20,35.5 55,37.5 82.5,37.5 97.5,37.5 105,37.5 112.5,37.5 120,37.5 15,38.5 20,38.5 25,40 32.5,40 40,40 47.5,40 17.5,42.5 55,45 75,45 82.5,45 105,45 112.5,45 120,45 25,47.5 32.5,47.5 40,47.5 47.5,47.5 10,50 17.5,50 75,52.5 82.5,52.5 112.5,52.5 120,52.5 15.5,55 20,55 10,57.5 15.5,58.5 20,58.5 55,60 75,60 82.5,60 105,60 112.5,60 120,60 105,67.5 112.5,67.5 120,67.5 112.5,75 120,75
  other v2: 126.5,20.25 129,20.25 131.5,20.25 126.5,22.75 129,22.75 131.5,22.75 126.5,25.25 129,25.25 131.5,25.25 126.5,45.25 129,45.25 131.5,45.25 126.5,47.75 129,47.75 131.5,47.75 126.5,50.25 129,50.25 131.5,50.25 126.5,70.25 129,70.25 131.5,70.25 126.5,72.75 129,72.75 131.5,72.75 126.5,75.25 129,75.25 131.5,75.25
pads on no net: U1.5 U1.7 U2.5

## Polygon pours and split planes (outlines as drawn)
GND on Top Layer "GND_L01_P041" (solid, remove dead copper, pour order 41): 1,77 3,79 132,79 134,77 134,3 132,1 3,1 1,3
VBAT on Top Layer "Top Layer-VBAT" (solid, pour order 39): 11,40 13,38 13,36 15.4,33.6 31.5,33.6 31.5,34.75 29,34.75 29,36 31,38 47,38 49,36 51,34 62,34 66,30 66,21 68,19 132,19 133,20 133,26 132,27 124,27 123,28 123,43 124,44 132,44 133,45 133,51 132,52 124,52 123,53 123,68 124,69 132,69 133,70 133,76 132,77 107,77 104,74 104,64 102,62 52,62 50,60 50,51 48,49 27,49 25,51 25,56 27,58 31.5,58 31.5,59 27,59 26,60 5,60 3,58 3,42 5,40
5V/3A on Top Layer "Top Layer-5V/3A" (solid, pour order 26): 37.5,24 31.9,29.6 28.3,29.6 28.3,25.633 29.627,24.306 33.094,24.306 34.306,23.094 34.306,4.994 35.3,4 116.5,4 116.5,11 115.5,12 113.756,12 112.5,10.744 112.5,7 104.5,7 104.5,11 103.5,12 101.5,12 100.5,11 100.5,7 92.5,7 92.5,11 91.5,12 89.5,12 88.5,11 88.5,7 80.5,7 80.5,11 79.5,12 77.5,12 76.5,11 76.5,7 68.5,7 68.5,11 67.5,12 65.5,12 64.5,11 64.5,7 56.5,7 56.5,12 57.5,13 60,13 60,22 58,24
5V/5A on Top Layer "Top Layer-5V/5A" (solid, pour order 14): 34.5,62.5 37,65 37,74 38,75 42,75 43,74 43,72 44,71 54,71 55,70 55,69 56,68 60,68 60,71.5 61,72.5 62.5,72.5 63.5,71.5 63.5,68 73,68 73,71.5 74,72.5 75.5,72.5 76.5,71.5 76.5,68 86,68 86,71.5 87,72.5 88.5,72.5 89.5,71.5 89.5,68 99,68 99,71.5 100,72.5 101.5,72.5 103,71 103,65 100.5,62.5
L_OUT_3A on Top Layer "L_OUT_3A_L01_P012" (solid, pour order 12): 23,33 21,31 21,26 20,25 18,23 18,20 19,19 24,19 25,18 25,5 26,4 33,4 34,5 34,23 33,24 29.5,24 28,25.5 28,31 30,33
L_OUT_5A on Top Layer "L_OUT_5A_L01_P002" (solid, pour order 2): 20,68 18,70 18,74 20,76 30,76 31.5,74.5 31.5,59.25 27.25,59.25 26,60.5 26,64 22,68
GND on Bottom Layer "GND_L02_P038" (solid, pour order 38): 1,77 3,79 132,79 134,77 134,3 132,1 3,1 1,3
VBAT on Bottom Layer "Top Layer-VBAT" (solid, pour order 35): 11,40 13,38 13,36 15.4,33.6 31.5,33.6 31.5,34.75 29,34.75 29,36 31,38 47,38 49,36 51,34 62,34 66,30 66,21 68,19 132,19 133,20 133,26 132,27 124,27 123,28 123,43 124,44 132,44 133,45 133,51 132,52 124,52 123,53 123,68 124,69 132,69 133,70 133,76 132,77 107,77 104,74 104,64 102,62 52,62 50,60 50,51 48,49 27,49 25,51 25,56 27,58 31.5,58 31.5,59 27,59 26,60 5,60 3,58 3,42 5,40

## Other copper
Top Layer:
  pour cut-out: 31.7,54.2 31.8,54.1 32.1,54.1 32.1,61.5 36,65.4 31.7,65.4

## Silkscreen, mask and mechanical layers (free items; w line width, h text height)
Top Overlay:
  drawing of 71 lines, arcs and shapes, not listed
  text "ESC1+" at 124.7,70.3 h1.5 r90
  text "GND" at 59.15,68.3 h1 r180
  text "5V" at 62.4,68.3 h1 r180
  text "GND" at 72.15,68.3 h1 r180
  text "5V" at 75.4,68.3 h1 r180
  text "GND" at 85.15,68.3 h1 r180
  text "5V" at 88.4,68.3 h1 r180
  text "GND" at 98.15,68.3 h1 r180
  text "5V" at 101.4,68.3 h1 r180
  text "5V/5A" at 83.75,64.75 h2 r180
  text "ESC1-" at 124.7,55.3 h1.5 r90
  text "POWER / DISTRIBUTION / BOARD V1.1" at 84,48 h10
  text "VBAT" at 11.55,45.7 h1.25 r270
  text "ESC2+" at 124.7,45.3 h1.5 r90
  text "Designed by / Oğuzhan GÜVERCİN" at 84,39 h5
  text "GND" at 11.55,37.95 h1.25 r270
  text "ESC2-" at 124.7,30.3 h1.5 r90
  text "A" at 83.931,25.222 h15
  text "E" at 95.931,25.222 h15
  text "H" at 107.931,25.222 h15
  text "ESC3+" at 124.7,20.3 h1.5 r90
  text "5V/3A" at 81.5,15.5 h2
  text "GND" at 57.126,11.662 h1
  text "5V" at 53.8,11.55 h1
  text "5V" at 65.8,11.55 h1
  text "5V" at 77.8,11.55 h1
  text "GND" at 81.05,11.55 h1
  text "5V" at 89.8,11.55 h1
  text "GND" at 93.05,11.55 h1
  text "5V" at 101.8,11.55 h1
  text "GND" at 105.05,11.55 h1
  text "5V" at 113.8,11.55 h1
  text "GND" at 117.05,11.55 h1
  text "ESC3-" at 124.7,5.3 h1.5 r90
Bottom Overlay:
  text "ESC6-" at 124.7,75.798 h1.5 r90
  text "ESC6+" at 124.7,60.798 h1.5 r90
  text "ESC5-" at 124.7,50.798 h1.5 r90
  text "ESC5+" at 124.7,35.798 h1.5 r90
  text "ESC4-" at 124.7,25.798 h1.5 r90
  text "ESC4+" at 124.7,10.798 h1.5 r90
Mechanical 13:
  lines w0.3: 2.5,87.5 0,90 ; 2.5,92.5 0,90 ; 132.5,87.5 135,90 ; 132.5,92.5 135,90 ; 142.5,2.5 145,0 ; 142.5,77.5 145,80 ; 147.5,2.5 145,0 ; 147.5,77.5 145,80 ; 0,90 135,90 ; 145,0 145,80
Mechanical 15:
  the board outline again, w0.05
Mechanical 29:
  text "135mm" at 62.5,90 h2
  text "80mm" at 145,45 h2 r270